# Altium PCB MolsonPCB.PcbDoc (part 9 of 9)
Units mil, origin at the board's own origin, x right, y up, seen from the top; angles counter-clockwise.
Board outline 8000 x 6000 mil, 14 copper layers (TopLayer (1 oz), InternalPlane1 (0.5 oz), InternalPlane2 (0.5 oz), MidLayer1 (0.5 oz), InternalPlane3 (0.5 oz), MidLayer2 (0.5 oz), InternalPlane4 (0.5 oz), InternalPlane5 (0.5 oz), MidLayer3 (0.5 oz), InternalPlane6 (0.5 oz), MidLayer4 (0.5 oz), InternalPlane7 (0.5 oz), InternalPlane8 (0.5 oz), BottomLayer (1 oz)), stack 86.2 mil thick; 657 components, 643 nets, 3094 pads, 1958 vias.
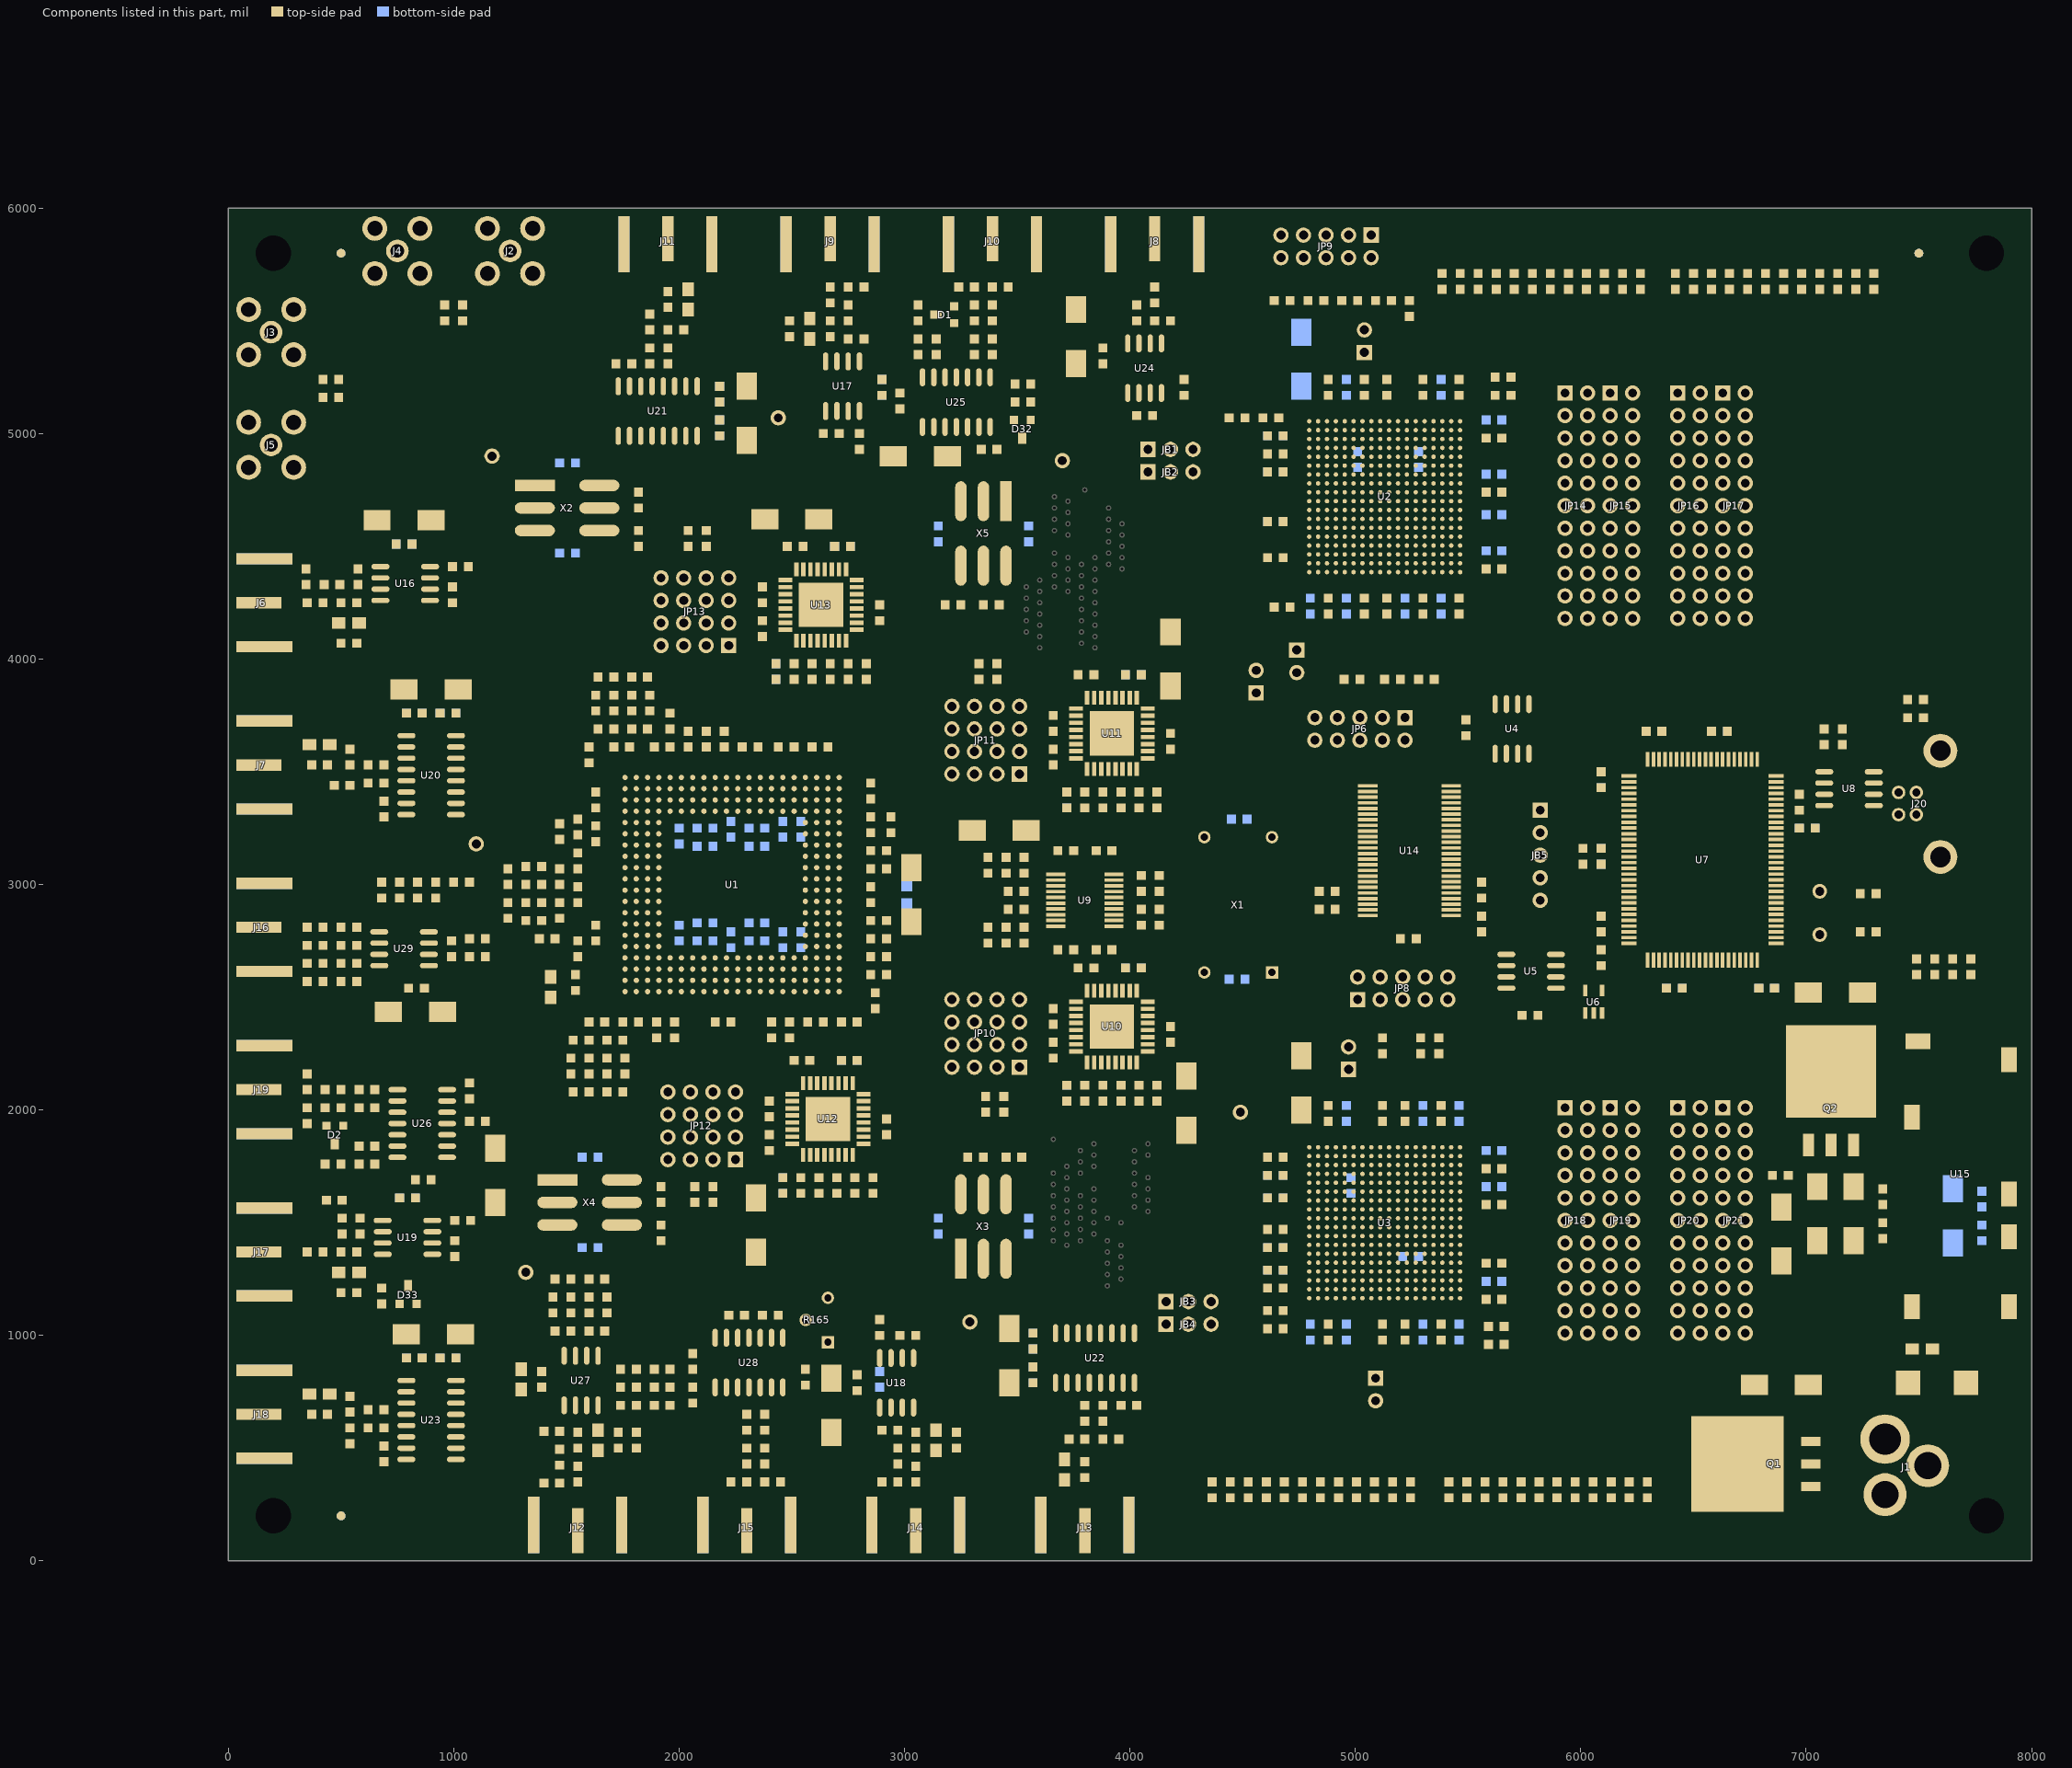
[diagram p21: the components of this part, seen from the top]

## Polygon pours and split planes (outlines as drawn)
GND on TopLayer (1 oz) (hatched Vertical grid 5 track 10): 910,2115 910,2025 885,2000 885,1930 910,1905 910,1875 885,1850 885,1755 860,1755 860,1860 835,1885 835,1900 810,1925 810,2000 835,2025 835,2115
GND on TopLayer (1 oz) (hatched Horizontal grid 5 track 10): 6920,3040 6920,3095 7265,3095 7325,3035 7325,3005 7295,3005 7260,3040
GND on TopLayer (1 oz) (hatched Horizontal grid 5 track 10): 6920,2750 6920,2915 6985,2850 6985,2745 7025,2705 7255,2705 7295,2745 7325,2745 7325,2715 7260,2650 7020,2650
GND on TopLayer (1 oz) (hatched Horizontal grid 5 track 10): 3405,5090 3315,5090 3290,5115 3165,5115 3165,5165 3190,5165 3215,5190 3295,5190 3310,5175 3405,5175
GND on TopLayer (1 oz) (hatched Horizontal grid 5 track 10): 1680,5150 1845,5150 1860,5135 1950,5135 1965,5150 1995,5150 2020,5125 2090,5125 2120,5155 2140,5155 2140,5045 2120,5045 2090,5075 2020,5075 1995,5050 1965,5050 1950,5065 1860,5065 1845,5050 1680,5050
GND on TopLayer (1 oz) (hatched Vertical grid 5 track 10): 850,3260 850,3425 865,3440 865,3530 850,3545 850,3575 875,3600 875,3670 845,3700 845,3720 955,3720 955,3700 925,3670 925,3600 950,3575 950,3545 935,3530 935,3440 950,3425 950,3260
GND on TopLayer (1 oz) (hatched Vertical grid 5 track 10): 850,400 850,565 865,580 865,670 850,685 850,715 875,740 875,810 845,840 845,860 955,860 955,840 925,810 925,740 950,715 950,685 935,670 935,580 950,565 950,400
GND on TopLayer (1 oz) (hatched Horizontal grid 5 track 10): 2520,830 2495,830 2470,855 2450,855 2425,830 2395,830 2370,855 2250,855 2225,830 2185,830 2185,930 2220,930 2245,905 2370,905 2395,930 2520,930
GND on TopLayer (1 oz) (hatched Horizontal grid 5 track 10): 4070,850 3905,850 3890,865 3800,865 3785,850 3755,850 3730,875 3660,875 3630,845 3610,845 3610,955 3630,955 3660,925 3730,925 3755,950 3800,905 3890,905 3935,950 4070,950
GND on TopLayer (1 oz) (hatched Horizontal grid 5 track 10): 6920,3040 7260,3040 7295,3005 7295,2900 7180,2900 7180,2925 7120,2925 7105,2910 7105,2840 7120,2825 7180,2825 7180,2850 7295,2850 7295,2745 7255,2705 7025,2705 6985,2745 6985,2850 6920,2915 6920,2750 7020,2650 7260,2650 7325,2715 7325,3035 7265,3095 6920,3095
GND on TopLayer (1 oz) (hatched Horizontal grid 5 track 10): 1940,3295 2530,3295 2530,3150 2500,3120 2500,2980 2530,2950 2530,2705 1985,2705 1940,2750 1940,2900 2015,2975 2015,3075 1940,3150
GND on TopLayer (1 oz) (hatched Vertical grid 5 track 10, remove dead copper): 4115,3175 4275,3335 4690,3335 4755,3270 4755,2485 4265,2485 4115,2635 4115,2815 4315,2815 4535,2595 4535,2515 4725,2515 4725,2705 4640,2705 4455,2890 4455,2925 4525,2995 4525,3170 4390,3305 4290,3305 4235,3250 4235,3170 4290,3115 4360,3115 4375,3100 4375,3060 4335,3020 4225,3020 4200,3045 4115,3045
GND on BottomLayer (1 oz) (hatched Horizontal grid 10 track 11, remove dead copper): 50,5950 50,50 7950,50 7950,5950
GND on BottomLayer (1 oz) (hatched Horizontal grid 5 track 6, remove dead copper): 1940,3295 2530,3295 2530,3205 2465,3140 1940,3140
GND on BottomLayer (1 oz) (hatched Horizontal grid 5 track 10, remove dead copper): 2535,2895 1935,2895 1935,2810 2045,2700 2535,2700
GND on InternalPlane1 (0.5 oz) (split plane): 4069.4,989.37 cw(c4080,1000) 4064.98,1000 4064.98,1420 cw(c4080,1420) 4069.4,1430.63 4069.38,1430.62 4129.98,1491.22 4129.98,1750 cw(c4145,1750) 4134.4,1760.63 4134.38,1760.62 4769.98,2396.22 4769.98,3308.78 4489.38,3589.38 4489.4,3589.37 cw(c4500,3600) 4484.98,3600 4484.98,4273.78 3989.38,4769.38 3989.4,4769.37 cw(c4000,4780) 3984.98,4780 3984.98,4980 cw(c4000,4980) 3989.4,4990.63 3989.38,4990.62 4019.38,5020.62 4019.37,5020.6 cw(c4030,5010) 4030,5025.02 4173.78,5025.02 4379.98,5231.22 4379.98,5500 cw(c4395,5500) 4384.4,5510.63 4384.38,5510.62 4454.98,5581.22 4454.98,5979.99 20.02,5979.99 20.02,20.01 4159.98,20.01 4159.98,898.78
+1.5V on InternalPlane1 (0.5 oz) (split plane): 4095.02,1006.22 4185.62,915.62 4185.6,915.63 cw(c4175,905) 4190.02,905 4190.02,20.01 7979.99,20.01 7979.99,2994.98 7545,2994.98 cw(c7545,3010) 7534.37,2999.4 7534.38,2999.38 7474.38,3059.38 7474.4,3059.37 cw(c7485,3070) 7469.99,3070 7469.99,3175 cw(c7485,3175) 7474.4,3185.63 7474.38,3185.62 7579.99,3291.22 7579.99,3423.78 7474.38,3529.38 7474.4,3529.37 cw(c7485,3540) 7469.99,3540 7469.99,3860 cw(c7485,3860) 7485,3875.02 7979.99,3875.02 7979.99,5979.99 4485.02,5979.99 4485.02,5575 cw(c4470,5575) 4480.6,5564.37 4480.62,5564.38 4410.02,5493.78 4410.02,5225 cw(c4395,5225) 4405.6,5214.37 4405.62,5214.38 4190.62,4999.38 4190.63,4999.4 cw(c4180,5010) 4180,4994.98 4036.22,4994.98 4015.02,4973.78 4015.02,4786.22 4510.62,4290.62 4510.6,4290.63 cw(c4500,4280) 4515.02,4280 4515.02,3606.22 4795.62,3325.62 4795.6,3325.63 cw(c4785,3315) 4800.02,3315 4800.02,2390 cw(c4785,2390) 4795.6,2379.37 4795.62,2379.38 4160.02,1743.78 4160.02,1485 cw(c4145,1485) 4155.6,1474.37 4155.62,1474.38 4095.02,1413.78
S_01 on InternalPlane1 (0.5 oz) (split plane): 7500.01,3076.22 7500.01,3168.78 7605.62,3274.38 7605.6,3274.37 ccw(c7595,3285) 7610.01,3285 7610.01,3430 ccw(c7595,3430) 7605.6,3440.63 7605.62,3440.62 7500.01,3546.22 7500.01,3844.98 7979.99,3844.98 7979.99,3025.02 7551.22,3025.02
GND on InternalPlane2 (0.5 oz) (split plane): 7469.99,3070 7469.99,3175 cw(c7485,3175) 7474.4,3185.63 7474.38,3185.62 7579.99,3291.22 7579.99,3423.78 7474.38,3529.38 7474.4,3529.37 cw(c7485,3540) 7469.99,3540 7469.99,3860 cw(c7485,3860) 7485,3875.02 7979.99,3875.02 7979.99,5979.99 20.02,5979.99 20.02,20.01 7979.99,20.01 7979.99,2994.98 7545,2994.98 cw(c7545,3010) 7534.37,2999.4 7534.38,2999.38 7474.38,3059.38 7474.4,3059.37 cw(c7485,3070)
S_01 on InternalPlane2 (0.5 oz) (split plane): 7500.01,3076.22 7500.01,3168.78 7605.62,3274.38 7605.6,3274.37 ccw(c7595,3285) 7610.01,3285 7610.01,3430 ccw(c7595,3430) 7605.6,3440.63 7605.62,3440.62 7500.01,3546.22 7500.01,3844.98 7979.99,3844.98 7979.99,3025.02 7551.22,3025.02
GND on InternalPlane3 (0.5 oz) (split plane): 7469.99,3070 7469.99,3175 cw(c7485,3175) 7474.4,3185.63 7474.38,3185.62 7579.99,3291.22 7579.99,3423.78 7474.38,3529.38 7474.4,3529.37 cw(c7485,3540) 7469.99,3540 7469.99,3860 cw(c7485,3860) 7485,3875.02 7979.99,3875.02 7979.99,5979.99 20.02,5979.99 20.02,20.01 7979.99,20.01 7979.99,2994.98 7545,2994.98 cw(c7545,3010) 7534.37,2999.4 7534.38,2999.38 7474.38,3059.38 7474.4,3059.37 cw(c7485,3070)
S_01 on InternalPlane3 (0.5 oz) (split plane): 7500.01,3076.22 7500.01,3168.78 7605.62,3274.38 7605.6,3274.37 ccw(c7595,3285) 7610.01,3285 7610.01,3430 ccw(c7595,3430) 7605.6,3440.63 7605.62,3440.62 7500.01,3546.22 7500.01,3844.98 7979.99,3844.98 7979.99,3025.02 7551.22,3025.02
+1.5VA on InternalPlane4 (0.5 oz) (split plane): 7469.99,3070 7469.99,3175 cw(c7485,3175) 7474.4,3185.63 7474.38,3185.62 7579.99,3291.22 7579.99,3423.78 7474.38,3529.38 7474.4,3529.37 cw(c7485,3540) 7469.99,3540 7469.99,3860 cw(c7485,3860) 7485,3875.02 7979.99,3875.02 7979.99,5979.99 20.02,5979.99 20.02,20.01 7979.99,20.01 7979.99,2994.98 7545,2994.98 cw(c7545,3010) 7534.37,2999.4 7534.38,2999.38 7474.38,3059.38 7474.4,3059.37 cw(c7485,3070)
S_01 on InternalPlane4 (0.5 oz) (split plane): 7500.01,3076.22 7500.01,3168.78 7605.62,3274.38 7605.6,3274.37 ccw(c7595,3285) 7610.01,3285 7610.01,3430 ccw(c7595,3430) 7605.6,3440.63 7605.62,3440.62 7500.01,3546.22 7500.01,3844.98 7979.99,3844.98 7979.99,3025.02 7551.22,3025.02
+5V on InternalPlane5 (0.5 oz) (split plane): 7469.99,3070 7469.99,3175 cw(c7485,3175) 7474.4,3185.63 7474.38,3185.62 7579.99,3291.22 7579.99,3423.78 7474.38,3529.38 7474.4,3529.37 cw(c7485,3540) 7469.99,3540 7469.99,3860 cw(c7485,3860) 7485,3875.02 7979.99,3875.02 7979.99,5979.99 20.02,5979.99 20.02,20.01 7979.99,20.01 7979.99,2994.98 7545,2994.98 cw(c7545,3010) 7534.37,2999.4 7534.38,2999.38 7474.38,3059.38 7474.4,3059.37 cw(c7485,3070)
S_01 on InternalPlane5 (0.5 oz) (split plane): 7500.01,3076.22 7500.01,3168.78 7605.62,3274.38 7605.6,3274.37 ccw(c7595,3285) 7610.01,3285 7610.01,3430 ccw(c7595,3430) 7605.6,3440.63 7605.62,3440.62 7500.01,3546.22 7500.01,3844.98 7979.99,3844.98 7979.99,3025.02 7551.22,3025.02
GND on InternalPlane6 (0.5 oz) (split plane): 7469.99,3070 7469.99,3175 cw(c7485,3175) 7474.4,3185.63 7474.38,3185.62 7579.99,3291.22 7579.99,3423.78 7474.38,3529.38 7474.4,3529.37 cw(c7485,3540) 7469.99,3540 7469.99,3860 cw(c7485,3860) 7485,3875.02 7979.99,3875.02 7979.99,5979.99 20.02,5979.99 20.02,20.01 7979.99,20.01 7979.99,2994.98 7545,2994.98 cw(c7545,3010) 7534.37,2999.4 7534.38,2999.38 7474.38,3059.38 7474.4,3059.37 cw(c7485,3070)
S_01 on InternalPlane6 (0.5 oz) (split plane): 7500.01,3076.22 7500.01,3168.78 7605.62,3274.38 7605.6,3274.37 ccw(c7595,3285) 7610.01,3285 7610.01,3430 ccw(c7595,3430) 7605.6,3440.63 7605.62,3440.62 7500.01,3546.22 7500.01,3844.98 7979.99,3844.98 7979.99,3025.02 7551.22,3025.02
GND on InternalPlane7 (0.5 oz) (split plane): 7469.99,3070 7469.99,3175 cw(c7485,3175) 7474.4,3185.63 7474.38,3185.62 7579.99,3291.22 7579.99,3423.78 7474.38,3529.38 7474.4,3529.37 cw(c7485,3540) 7469.99,3540 7469.99,3860 cw(c7485,3860) 7485,3875.02 7979.99,3875.02 7979.99,5979.99 20.02,5979.99 20.02,20.01 7979.99,20.01 7979.99,2994.98 7545,2994.98 cw(c7545,3010) 7534.37,2999.4 7534.38,2999.38 7474.38,3059.38 7474.4,3059.37 cw(c7485,3070)
S_01 on InternalPlane7 (0.5 oz) (split plane): 7500.01,3076.22 7500.01,3168.78 7605.62,3274.38 7605.6,3274.37 ccw(c7595,3285) 7610.01,3285 7610.01,3430 ccw(c7595,3430) 7605.6,3440.63 7605.62,3440.62 7500.01,3546.22 7500.01,3844.98 7979.99,3844.98 7979.99,3025.02 7551.22,3025.02
+3.3V on InternalPlane8 (0.5 oz) (split plane): 7469.99,3070 7469.99,3175 cw(c7485,3175) 7474.4,3185.63 7474.38,3185.62 7579.99,3291.22 7579.99,3423.78 7474.38,3529.38 7474.4,3529.37 cw(c7485,3540) 7469.99,3540 7469.99,3860 cw(c7485,3860) 7485,3875.02 7979.99,3875.02 7979.99,5979.99 20.02,5979.99 20.02,20.01 7979.99,20.01 7979.99,2994.98 7545,2994.98 cw(c7545,3010) 7534.37,2999.4 7534.38,2999.38 7474.38,3059.38 7474.4,3059.37 cw(c7485,3070)
S_01 on InternalPlane8 (0.5 oz) (split plane): 7500.01,3076.22 7500.01,3168.78 7605.62,3274.38 7605.6,3274.37 ccw(c7595,3285) 7610.01,3285 7610.01,3430 ccw(c7595,3430) 7605.6,3440.63 7605.62,3440.62 7500.01,3546.22 7500.01,3844.98 7979.99,3844.98 7979.99,3025.02 7551.22,3025.02

## Keep-outs
BottomLayer (1 oz):
  circle w10: c500,200 r100
  circle w10: c7500,5800 r100
  circle w10: c500,5800 r100
Keep-Out Layer:
  circle w10: c200,200 r137.8
  circle w10: c200,5800 r137.8
  circle w10: c7800,5800 r137.8
  circle w10: c7800,200 r137.8
  lines w10: 0,0 0,6000 8000,6000 8000,0 0,0

## Other copper
TopLayer (1 oz):
  rectangle net GND: 3725,2765 3875,3095
  text ".GTL" at 3915,-1690 h60
  text ".Layer_Name" at 2115,-1697 h60
MidLayer1 (0.5 oz):
  text ".G1" at 3915,-1690 h60
  text ".Layer_Name" at 2124,-1698 h60
MidLayer2 (0.5 oz):
  text ".G2" at 3915,-1690 h60
  text ".Layer_Name" at 2124,-1700 h60
MidLayer3 (0.5 oz):
  text ".G3" at 3915,-1690 h60
  text ".Layer_Name" at 2115,-1692 h60
MidLayer4 (0.5 oz):
  text ".G4" at 3915,-1690 h60
  text ".Layer_Name" at 2115,-1692 h60
BottomLayer (1 oz):
  text ".GBL" at 3915,-1690 h60
  text ".Layer_Name" at 2124,-1698 h60
InternalPlane1 (0.5 oz) (plane layer: these items are gaps in the copper):
  region: 525,1580 525,1620 415,1620 415,1580
  region: 515,4310 515,4350 405,4350 405,4310
  region: 2730,5670 2730,5630 2840,5630 2840,5670
  rectangle: 2775,4910 2825,5155
  rectangle: 840,4385 1085,4435
  rectangle: 850,1485 1095,1535
  rectangle: 1930,5290 1970,5400
  region: 1930,5480 1930,5440 2040,5440 2040,5480
  rectangle: 1930,5540 1970,5650
  rectangle: 1850,5440 1890,5550
  rectangle: 1850,5290 1890,5400
  region: 710,3510 710,3550 600,3550 600,3510
  region: 710,3430 710,3470 600,3470 600,3430
  region: 560,3420 560,3460 450,3460 450,3420
  region: 460,3510 460,3550 350,3550 350,3510
  rectangle: 520,3510 560,3620
  region: 710,650 710,690 600,690 600,650
  region: 710,570 710,610 600,610 600,570
  region: 460,630 460,670 350,670 350,630
  rectangle: 520,640 560,750
  rectangle: 520,500 560,610
  rectangle: 565,1430 605,1540
  rectangle: 485,1430 525,1540
  region: 590,1350 590,1390 480,1390 480,1350
  region: 440,1350 440,1390 330,1390 330,1350
  region: 590,1170 590,1210 480,1210 480,1170
  region: 440,4230 440,4270 330,4270 330,4230
  region: 590,4050 590,4090 480,4090 480,4050
  region: 590,4230 590,4270 480,4270 480,4230
  rectangle: 325,4310 365,4420
  rectangle: 555,4310 595,4420
  rectangle: 2650,5560 2690,5670
  rectangle: 2470,5410 2510,5520
  rectangle: 2650,5410 2690,5520
  region: 2770,5590 2730,5590 2730,5480 2770,5480
  region: 2840,5400 2840,5440 2730,5440 2730,5400
  region: 1840,2370 1840,2410 1730,2410 1730,2370
  rectangle: 2015,5520 2065,5670
  rectangle: 2555,5390 2605,5540
  region: 610,4135 610,4185 460,4185 460,4135
  region: 480,3595 480,3645 330,3645 330,3595
  region: 610,1255 610,1305 460,1305 460,1255
  region: 480,715 480,765 330,765 330,715
  lines w30: 0,0 4175,0 4175,905 4080,1000 4080,1420 4145,1485 4145,1750 4785,2390 4785,3315 4500,3600 4500,4280 4000,4780 4000,4980 4030,5010 4180,5010 4395,5225 4395,5500 4470,5575 4470,6000 0,6000 0,0 ; 7485,3070 7545,3010 8000,3010 8000,3860 7485,3860 7485,3540 7595,3430 7595,3285 7485,3175 7485,3070
  text ".GP1" at 3915,-1690 h60
  text ".Layer_Name" at 2121,-1698 h60
InternalPlane2 (0.5 oz) (plane layer: these items are gaps in the copper):
  region: 525,1580 525,1620 415,1620 415,1580
  region: 515,4310 515,4350 405,4350 405,4310
  region: 2730,5670 2730,5630 2840,5630 2840,5670
  rectangle: 850,1485 1095,1535
  rectangle: 840,4385 1085,4435
  rectangle: 2775,4910 2825,5155
  rectangle: 1930,5290 1970,5400
  region: 1930,5480 1930,5440 2040,5440 2040,5480
  rectangle: 1930,5540 1970,5650
  rectangle: 1850,5440 1890,5550
  rectangle: 1850,5290 1890,5400
  region: 710,3510 710,3550 600,3550 600,3510
  region: 710,3430 710,3470 600,3470 600,3430
  region: 560,3420 560,3460 450,3460 450,3420
  region: 460,3510 460,3550 350,3550 350,3510
  rectangle: 520,3510 560,3620
  region: 710,650 710,690 600,690 600,650
  region: 710,570 710,610 600,610 600,570
  region: 460,630 460,670 350,670 350,630
  rectangle: 520,640 560,750
  rectangle: 520,500 560,610
  rectangle: 565,1430 605,1540
  rectangle: 485,1430 525,1540
  region: 590,1350 590,1390 480,1390 480,1350
  region: 440,1350 440,1390 330,1390 330,1350
  region: 590,1170 590,1210 480,1210 480,1170
  region: 440,4230 440,4270 330,4270 330,4230
  region: 590,4050 590,4090 480,4090 480,4050
  region: 590,4230 590,4270 480,4270 480,4230
  rectangle: 325,4310 365,4420
  rectangle: 555,4310 595,4420
  rectangle: 2650,5560 2690,5670
  rectangle: 2470,5410 2510,5520
  rectangle: 2650,5410 2690,5520
  region: 2770,5590 2730,5590 2730,5480 2770,5480
  region: 2840,5400 2840,5440 2730,5440 2730,5400
  region: 1840,2370 1840,2410 1730,2410 1730,2370
  rectangle: 2015,5520 2065,5670
  rectangle: 2555,5390 2605,5540
  region: 610,4135 610,4185 460,4185 460,4135
  region: 480,3595 480,3645 330,3645 330,3595
  region: 610,1255 610,1305 460,1305 460,1255
  region: 480,715 480,765 330,765 330,715
  lines w30: 7485,3070 7485,3175 7595,3285 7595,3430 7485,3540 7485,3860 8000,3860 8000,3010 7545,3010 7485,3070
  text ".GP2" at 3915,-1690 h60
  text ".Layer_Name" at 2124,-1700 h60
InternalPlane3 (0.5 oz) (plane layer: these items are gaps in the copper):
  region: 525,1580 525,1620 415,1620 415,1580
  region: 515,4310 515,4350 405,4350 405,4310
  region: 2730,5670 2730,5630 2840,5630 2840,5670
  rectangle: 850,1485 1095,1535
  rectangle: 840,4385 1085,4435
  rectangle: 2775,4910 2825,5155
  rectangle: 1930,5290 1970,5400
  region: 1930,5480 1930,5440 2040,5440 2040,5480
  rectangle: 1930,5540 1970,5650
  rectangle: 1850,5440 1890,5550
  rectangle: 1850,5290 1890,5400
  region: 710,3510 710,3550 600,3550 600,3510
  region: 710,3430 710,3470 600,3470 600,3430
  region: 560,3420 560,3460 450,3460 450,3420
  region: 460,3510 460,3550 350,3550 350,3510
  rectangle: 520,3510 560,3620
  region: 710,650 710,690 600,690 600,650
  region: 710,570 710,610 600,610 600,570
  region: 460,630 460,670 350,670 350,630
  rectangle: 520,640 560,750
  rectangle: 520,500 560,610
  rectangle: 565,1430 605,1540
  rectangle: 485,1430 525,1540
  region: 590,1350 590,1390 480,1390 480,1350
  region: 440,1350 440,1390 330,1390 330,1350
  region: 590,1170 590,1210 480,1210 480,1170
  region: 440,4230 440,4270 330,4270 330,4230
  region: 590,4050 590,4090 480,4090 480,4050
  region: 590,4230 590,4270 480,4270 480,4230
  rectangle: 325,4310 365,4420
  rectangle: 555,4310 595,4420
  rectangle: 2650,5560 2690,5670
  rectangle: 2470,5410 2510,5520
  rectangle: 2650,5410 2690,5520
  region: 2770,5590 2730,5590 2730,5480 2770,5480
  region: 2840,5400 2840,5440 2730,5440 2730,5400
  region: 1840,2370 1840,2410 1730,2410 1730,2370
  rectangle: 2015,5520 2065,5670
  rectangle: 2555,5390 2605,5540
  region: 610,4135 610,4185 460,4185 460,4135
  region: 480,3595 480,3645 330,3645 330,3595
  region: 610,1255 610,1305 460,1305 460,1255
  region: 480,715 480,765 330,765 330,715
  lines w30: 7485,3070 7485,3175 7595,3285 7595,3430 7485,3540 7485,3860 8000,3860 8000,3010 7545,3010 7485,3070
  text ".GP3" at 3915,-1690 h60
  text ".Layer_Name" at 2121,-1698 h60
InternalPlane4 (0.5 oz) (plane layer: these items are gaps in the copper):
  region: 525,1580 525,1620 415,1620 415,1580
  region: 515,4310 515,4350 405,4350 405,4310
  region: 2730,5670 2730,5630 2840,5630 2840,5670
  rectangle: 2775,4910 2825,5155
  rectangle: 840,4385 1085,4435
  rectangle: 850,1485 1095,1535
  rectangle: 1930,5290 1970,5400
  region: 1930,5480 1930,5440 2040,5440 2040,5480
  rectangle: 1930,5540 1970,5650
  rectangle: 1850,5440 1890,5550
  rectangle: 1850,5290 1890,5400
  region: 710,3510 710,3550 600,3550 600,3510
  region: 710,3430 710,3470 600,3470 600,3430
  region: 560,3420 560,3460 450,3460 450,3420
  region: 460,3510 460,3550 350,3550 350,3510
  rectangle: 520,3510 560,3620
  region: 710,650 710,690 600,690 600,650
  region: 710,570 710,610 600,610 600,570
  region: 460,630 460,670 350,670 350,630
  rectangle: 520,640 560,750
  rectangle: 520,500 560,610
  rectangle: 565,1430 605,1540
  rectangle: 485,1430 525,1540
  region: 590,1350 590,1390 480,1390 480,1350
  region: 440,1350 440,1390 330,1390 330,1350
  region: 590,1170 590,1210 480,1210 480,1170
  region: 440,4230 440,4270 330,4270 330,4230
  region: 590,4050 590,4090 480,4090 480,4050
  region: 590,4230 590,4270 480,4270 480,4230
  rectangle: 325,4310 365,4420
  rectangle: 555,4310 595,4420
  rectangle: 2650,5560 2690,5670
  rectangle: 2470,5410 2510,5520
  rectangle: 2650,5410 2690,5520
  region: 2770,5590 2730,5590 2730,5480 2770,5480
  region: 2840,5400 2840,5440 2730,5440 2730,5400
  region: 1840,2370 1840,2410 1730,2410 1730,2370
  rectangle: 2015,5520 2065,5670
  rectangle: 2555,5390 2605,5540
  region: 610,4135 610,4185 460,4185 460,4135
  region: 480,3595 480,3645 330,3645 330,3595
  region: 610,1255 610,1305 460,1305 460,1255
  region: 480,715 480,765 330,765 330,715
  lines w30: 7485,3070 7485,3175 7595,3285 7595,3430 7485,3540 7485,3860 8000,3860 8000,3010 7545,3010 7485,3070
  text ".GP4" at 3915,-1690 h60
  text ".Layer_Name" at 2121,-1698 h60
InternalPlane5 (0.5 oz) (plane layer: these items are gaps in the copper):
  region: 525,1580 525,1620 415,1620 415,1580
  region: 515,4310 515,4350 405,4350 405,4310
  region: 2730,5670 2730,5630 2840,5630 2840,5670
  rectangle: 850,1485 1095,1535
  rectangle: 840,4385 1085,4435
  rectangle: 2775,4910 2825,5155
  rectangle: 1930,5290 1970,5400
  region: 1930,5480 1930,5440 2040,5440 2040,5480
  rectangle: 1930,5540 1970,5650
  rectangle: 1850,5440 1890,5550
  rectangle: 1850,5290 1890,5400
  region: 710,3510 710,3550 600,3550 600,3510
  region: 710,3430 710,3470 600,3470 600,3430
  region: 560,3420 560,3460 450,3460 450,3420
  region: 460,3510 460,3550 350,3550 350,3510
  rectangle: 520,3510 560,3620
  region: 710,650 710,690 600,690 600,650
  region: 710,570 710,610 600,610 600,570
  region: 460,630 460,670 350,670 350,630
  rectangle: 520,640 560,750
  rectangle: 520,500 560,610
  rectangle: 565,1430 605,1540
  rectangle: 485,1430 525,1540
  region: 590,1350 590,1390 480,1390 480,1350
  region: 440,1350 440,1390 330,1390 330,1350
  region: 590,1170 590,1210 480,1210 480,1170
  region: 440,4230 440,4270 330,4270 330,4230
  region: 590,4050 590,4090 480,4090 480,4050
  region: 590,4230 590,4270 480,4270 480,4230
  rectangle: 325,4310 365,4420
  rectangle: 555,4310 595,4420
  rectangle: 2650,5560 2690,5670
  rectangle: 2470,5410 2510,5520
  rectangle: 2650,5410 2690,5520
  region: 2770,5590 2730,5590 2730,5480 2770,5480
  region: 2840,5400 2840,5440 2730,5440 2730,5400
  region: 1840,2370 1840,2410 1730,2410 1730,2370
  rectangle: 2015,5520 2065,5670
  rectangle: 2555,5390 2605,5540
  region: 610,4135 610,4185 460,4185 460,4135
  region: 480,3595 480,3645 330,3645 330,3595
  region: 610,1255 610,1305 460,1305 460,1255
  region: 480,715 480,765 330,765 330,715
  lines w30: 7485,3070 7485,3175 7595,3285 7595,3430 7485,3540 7485,3860 8000,3860 8000,3010 7545,3010 7485,3070
  text ".GP5" at 3915,-1690 h60
  text ".Layer_Name" at 2121,-1698 h60
InternalPlane6 (0.5 oz) (plane layer: these items are gaps in the copper):
  region: 525,1580 525,1620 415,1620 415,1580
  region: 515,4310 515,4350 405,4350 405,4310
  region: 2730,5670 2730,5630 2840,5630 2840,5670
  rectangle: 850,1485 1095,1535
  rectangle: 840,4385 1085,4435
  rectangle: 2775,4910 2825,5155
  rectangle: 1930,5290 1970,5400
  region: 1930,5480 1930,5440 2040,5440 2040,5480
  rectangle: 1930,5540 1970,5650
  rectangle: 1850,5440 1890,5550
  rectangle: 1850,5290 1890,5400
  region: 710,3510 710,3550 600,3550 600,3510
  region: 710,3430 710,3470 600,3470 600,3430
  region: 560,3420 560,3460 450,3460 450,3420
  region: 460,3510 460,3550 350,3550 350,3510
  rectangle: 520,3510 560,3620
  region: 710,650 710,690 600,690 600,650
  region: 710,570 710,610 600,610 600,570
  region: 460,630 460,670 350,670 350,630
  rectangle: 520,640 560,750
  rectangle: 520,500 560,610
  rectangle: 565,1430 605,1540
  rectangle: 485,1430 525,1540
  region: 590,1350 590,1390 480,1390 480,1350
  region: 440,1350 440,1390 330,1390 330,1350
  region: 590,1170 590,1210 480,1210 480,1170
  region: 440,4230 440,4270 330,4270 330,4230
  region: 590,4050 590,4090 480,4090 480,4050
  region: 590,4230 590,4270 480,4270 480,4230
  rectangle: 325,4310 365,4420
  rectangle: 555,4310 595,4420
  rectangle: 2650,5560 2690,5670
  rectangle: 2470,5410 2510,5520
  rectangle: 2650,5410 2690,5520
  region: 2770,5590 2730,5590 2730,5480 2770,5480
  region: 2840,5400 2840,5440 2730,5440 2730,5400
  region: 1840,2370 1840,2410 1730,2410 1730,2370
  rectangle: 2015,5520 2065,5670
  rectangle: 2555,5390 2605,5540
  region: 610,4135 610,4185 460,4185 460,4135
  region: 480,3595 480,3645 330,3645 330,3595
  region: 610,1255 610,1305 460,1305 460,1255
  region: 480,715 480,765 330,765 330,715
  lines w30: 7485,3070 7485,3175 7595,3285 7595,3430 7485,3540 7485,3860 8000,3860 8000,3010 7545,3010 7485,3070
  text ".GP6" at 3915,-1690 h60
  text ".Layer_Name" at 2121,-1698 h60
InternalPlane7 (0.5 oz) (plane layer: these items are gaps in the copper):
  region: 525,1580 525,1620 415,1620 415,1580
  region: 515,4310 515,4350 405,4350 405,4310
  region: 2730,5670 2730,5630 2840,5630 2840,5670
  rectangle: 850,1485 1095,1535
  rectangle: 840,4385 1085,4435
  rectangle: 2775,4910 2825,5155
  rectangle: 1930,5290 1970,5400
  region: 1930,5480 1930,5440 2040,5440 2040,5480
  rectangle: 1930,5540 1970,5650
  rectangle: 1850,5440 1890,5550
  rectangle: 1850,5290 1890,5400
  region: 710,3510 710,3550 600,3550 600,3510
  region: 710,3430 710,3470 600,3470 600,3430
  region: 560,3420 560,3460 450,3460 450,3420
  region: 460,3510 460,3550 350,3550 350,3510
  rectangle: 520,3510 560,3620
  region: 710,650 710,690 600,690 600,650
  region: 710,570 710,610 600,610 600,570
  region: 460,630 460,670 350,670 350,630
  rectangle: 520,640 560,750
  rectangle: 520,500 560,610
  rectangle: 565,1430 605,1540
  rectangle: 485,1430 525,1540
  region: 590,1350 590,1390 480,1390 480,1350
  region: 440,1350 440,1390 330,1390 330,1350
  region: 590,1170 590,1210 480,1210 480,1170
  region: 440,4230 440,4270 330,4270 330,4230
  region: 590,4050 590,4090 480,4090 480,4050
  region: 590,4230 590,4270 480,4270 480,4230
  rectangle: 325,4310 365,4420
  rectangle: 555,4310 595,4420
  rectangle: 2650,5560 2690,5670
  rectangle: 2470,5410 2510,5520
  rectangle: 2650,5410 2690,5520
  region: 2770,5590 2730,5590 2730,5480 2770,5480
  region: 2840,5400 2840,5440 2730,5440 2730,5400
  region: 1840,2370 1840,2410 1730,2410 1730,2370
  rectangle: 2015,5520 2065,5670
  rectangle: 2555,5390 2605,5540
  region: 610,4135 610,4185 460,4185 460,4135
  region: 480,3595 480,3645 330,3645 330,3595
  region: 610,1255 610,1305 460,1305 460,1255
  region: 480,715 480,765 330,765 330,715
  lines w30: 7485,3070 7545,3010 8000,3010 8000,3860 7485,3860 7485,3540 7595,3430 7595,3285 7485,3175 7485,3070
  text ".GP7" at 3915,-1690 h60
  text ".Layer_Name" at 2121,-1698 h60
InternalPlane8 (0.5 oz) (plane layer: these items are gaps in the copper):
  region: 525,1580 525,1620 415,1620 415,1580
  region: 515,4310 515,4350 405,4350 405,4310
  region: 2730,5670 2730,5630 2840,5630 2840,5670
  rectangle: 850,1485 1095,1535
  rectangle: 840,4385 1085,4435
  rectangle: 2775,4910 2825,5155
  rectangle: 1930,5290 1970,5400
  region: 1930,5480 1930,5440 2040,5440 2040,5480
  rectangle: 1930,5540 1970,5650
  rectangle: 1850,5440 1890,5550
  rectangle: 1850,5290 1890,5400
  region: 710,3510 710,3550 600,3550 600,3510
  region: 710,3430 710,3470 600,3470 600,3430
  region: 560,3420 560,3460 450,3460 450,3420
  region: 460,3510 460,3550 350,3550 350,3510
  rectangle: 520,3510 560,3620
  region: 710,650 710,690 600,690 600,650
  region: 710,570 710,610 600,610 600,570
  region: 460,630 460,670 350,670 350,630
  rectangle: 520,640 560,750
  rectangle: 520,500 560,610
  rectangle: 565,1430 605,1540
  rectangle: 485,1430 525,1540
  region: 590,1350 590,1390 480,1390 480,1350
  region: 440,1350 440,1390 330,1390 330,1350
  region: 590,1170 590,1210 480,1210 480,1170
  region: 440,4230 440,4270 330,4270 330,4230
  region: 590,4050 590,4090 480,4090 480,4050
  region: 590,4230 590,4270 480,4270 480,4230
  rectangle: 325,4310 365,4420
  rectangle: 555,4310 595,4420
  rectangle: 2650,5560 2690,5670
  rectangle: 2470,5410 2510,5520
  rectangle: 2650,5410 2690,5520
  region: 2770,5590 2730,5590 2730,5480 2770,5480
  region: 2840,5400 2840,5440 2730,5440 2730,5400
  region: 1840,2370 1840,2410 1730,2410 1730,2370
  rectangle: 2015,5520 2065,5670
  rectangle: 2555,5390 2605,5540
  region: 610,4135 610,4185 460,4185 460,4135
  region: 480,3595 480,3645 330,3645 330,3595
  region: 610,1255 610,1305 460,1305 460,1255
  region: 480,715 480,765 330,765 330,715
  lines w30: 7485,3070 7545,3010 8000,3010 8000,3860 7485,3860 7485,3540 7595,3430 7595,3285 7485,3175 7485,3070
  text ".GP8" at 3915,-1690 h60
  text ".Layer_Name" at 2121,-1698 h60

## Silkscreen, mask and mechanical layers (free items; w line width, h text height)
Top Overlay:
  drawing of 8041 lines, arcs and shapes, not listed
  text "1485A" at 5485,5785 h40 r90
  text "360A" at 5805,5785 h40 r90
  text "1485B" at 6520,5785 h40 r90
  text "540A" at 5645,5780 h40 r90
  text "270A" at 5965,5780 h40 r90
  text "LFIA" at 6125,5780 h40 r90
  text "CDA" at 6285,5780 h40 r90
  text "540B" at 6680,5780 h40 r90
  text "360B" at 6840,5780 h40 r90
  text "270B" at 7000,5780 h40 r90
  text "LFIB" at 7160,5780 h40 r90
  text "CDB" at 7320,5780 h40 r90
  text "OUTA2" at 1020,5760 h40 r90
  text "INB1" at 2255,5720 h40 r90
  text "OUTB1" at 2970,5720 h40 r90
  text "INB2" at 3690,5715 h40 r90
  text "OUTB2" at 4415,5715 h40 r90
  text "JTAG" at 4505,5710 h40 r90
  text "INA2" at 30,5180 h40
  text "TM" at 7535,4355 h20 r90
  text "TXA" at 5880,4065 h40
  text "RXA" at 6080,4065 h40
  text "TXB" at 6380,4065 h40
  text "RXB" at 6580,4065 h40
  text "CYV15G0403DXB-Video" at 7460,3975 h40 r90
  text "HOTLink II  Video Demonstration Board" at 7555,3975 h40 r90
  text "LS7652 Rev 1" at 7860,3975 h40 r90
  text "OUTA1" at 100,3950 h40
  text "INA1" at 140,3235 h40
  text "/" at 1155,2880 h40
  text "+5V" at 7590,2730 h40 r90
  text "+3.3V" at 7750,2730 h40 r90
  text "/" at 1160,2580 h40
  text "OUTD2" at 85,2510 h40
  text "IND2" at 125,1790 h40
  text "OUTD1" at 95,1070 h40
  text "TXC" at 5880,895 h40
  text "RXC" at 6080,895 h40
  text "TXD" at 6380,895 h40
  text "RXD" at 6585,895 h40
  text "IND1" at 140,350 h40
  text "INC1" at 4095,140 h40 r90
  text "INC2" at 2600,125 h40 r90
  text "CDC" at 5270,105 h40 r90
  text "CDD" at 6315,100 h40 r90
  text "OUTC1" at 3345,95 h40 r90
  text "-" at 6810,80 h40
  text "+9V" at 7010,80 h40
  text "OUTC2" at 1845,75 h40 r90
  text "LFIC" at 5110,70 h40 r90
  text "540C" at 4625,65 h40 r90
  text "360C" at 4785,65 h40 r90
  text "270C" at 4950,65 h40 r90
  text "360D" at 5835,65 h40 r90
  text "270D" at 5995,65 h40 r90
  text "LFID" at 6155,65 h40 r90
  text "540D" at 5675,60 h40 r90
  text "1485C" at 4465,30 h40 r90
  text "1485D" at 5515,30 h40 r90
  text ".GTO" at 3915,-1690 h60
  text ".Layer_Name" at 2121,-1700 h60
Bottom Overlay:
  text ".GBO" at 3915,-1690 h60
  text ".Layer_Name" at 2115,-1697 h60
Top Paste:
  text ".GTP" at 3915,-1690 h60
  text ".Layer_Name" at 2121,-1692 h60
Bottom Paste:
  text ".GBP" at 3915,-1690 h60
  text ".Layer_Name" at 2115,-1697 h60
Top Solder:
  text ".GTS" at 3915,-1690 h60
  text ".Layer_Name" at 2118,-1695 h60
Bottom Solder:
  text ".GBS" at 3915,-1690 h60
  text ".Layer_Name" at 2121,-1698 h60
Drill Guide:
  text ".Layer_Name" at 2118,-1699 h60
Mechanical 1:
  lines w10: 0,0 8000,0 8000,6000 0,6000 0,0
Mechanical 4:
  drawing of 383 lines, arcs and shapes, not listed
  text "8.0" at -1165,6130 h90
  text "Layer Stack Up Detail for: MolsonPCB2.PcbDoc" at 8310,5862.1 h52
  text "Layer" at 8310,5763.4 h29
  text "Name" at 8310,5705.4 h29
  text "TopLayer" at 8310,5623.98 h41
  text "InternalPlane1" at 8310,5509.95 h41
  text "InternalPlane2" at 8310,5395.91 h41
  text "MidLayer1" at 8310,5281.88 h41
  text "InternalPlane3" at 8310,5167.84 h41
  text "7.0" at -1165,5130 h90
  text "MidLayer2" at 8310,5053.8 h41
  text "InternalPlane4" at 8310,4939.77 h41
  text "InternalPlane5" at 8310,4825.73 h41
  text "MidLayer3" at 8310,4711.7 h41
  text "InternalPlane6" at 8310,4597.66 h41
  text "MidLayer4" at 8310,4483.63 h41
  text "InternalPlane7" at 8310,4369.59 h41
  text "InternalPlane8" at 8310,4255.56 h41
  text "BottomLayer" at 8310,4141.52 h41
  text "6.0" at -1165,4130 h90
  text "5.0" at -1165,3130 h90
  text "4.0" at -1165,2130 h90
  text "3.0" at -1165,1130 h90
  text "2.0" at -1165,130 h90
  text "Linear Systems Ltd." at 910,-695 h90
  text "1.0" at -1140,-870 h90
  text "TITLE:" at 852.5,-897.5 h45
  text "ENGINEER:" at -35,-910 h45
  text "Cypress CYV15G0403DXB" at 1310,-975 h60
  text "G. Cosens" at 120,-1010 h60
  text "Linear Systems Ltd." at 3105,-1090 h75
  text "PHONE: (204) 632-4300" at -35,-1097.5 h45
  text "TM" at 1480,-1105 h30
  text "HOTLink II  Video Evaluation Board" at 915,-1135 h60
  text "ENGINEER:" at -35,-1290 h45
  text "PART NO.:" at 865,-1372.5 h45
  text "REV:" at 2602.5,-1372.5 h45
  text "DATE:" at 3065,-1372.5 h45
  text "D. Shimizu" at 120,-1390 h60
  text "LS7652" at 1442.5,-1437.5 h90
  text "1" at 2777.5,-1447.5 h90
  text ".PRINT_DATE" at 3290,-1447.5 h90
  text "PHONE: (204) 632-4300" at -35,-1472.5 h45
  text "FILE NAME:" at -35,-1650 h45
  text "LAYER:" at 1805,-1650 h45
  text "GERBER:" at 3625,-1650 h45
  text ".PCB_FILE_NAME_NO_PATH" at 365,-1710 h90
  text "0" at -1052.5,-1870 h90
  text "Y" at -790,-1957.5 h90 r270
  text "X" at -627.5,-2170 h90
  text "0" at -490,-2370 h90 r270
  text "1.0" at 510,-2370 h90 r270
  text "2.0" at 1510,-2370 h90 r270
  text "3.0" at 2510,-2370 h90 r270
  text "4.0" at 3510,-2370 h90 r270
  text "5.0" at 4510,-2370 h90 r270
  text "6.0" at 5510,-2370 h90 r270
  text "7.0" at 6510,-2370 h90 r270
  text "8.0" at 7510,-2370 h90 r270
  text "9.0" at 8510,-2370 h90 r270
Drill Drawing:
  text ".LEGEND" at 8180,-195 h60
  text "Drill Drawing." at 8180,-295 h60
  text ".Layer_Name" at 2115,-1700 h60

## Dimensions
0,0 to 0,6000 on Mechanical 3
0,0 to 8000,0 on Mechanical 3

## Text inside footprints (layer, text, board x,y; h text height)
JP6: Top Overlay "1" at 5200,3845 h40 r270
JP8: Top Overlay "1" at 5030,2385 h40 r90
JP9: Top Overlay "1" at 5050,5985 h40 r270